# EAGLE board rescue_linea3cny (EAGLE 9.1.3)
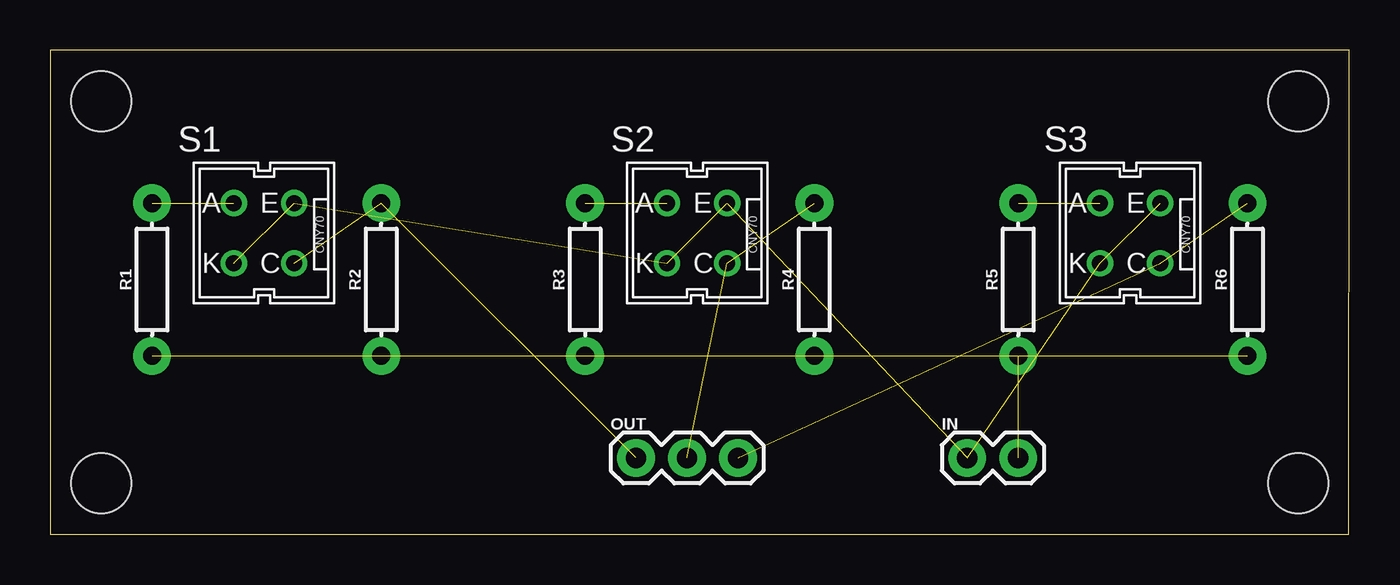
[diagram p0: board, top side]
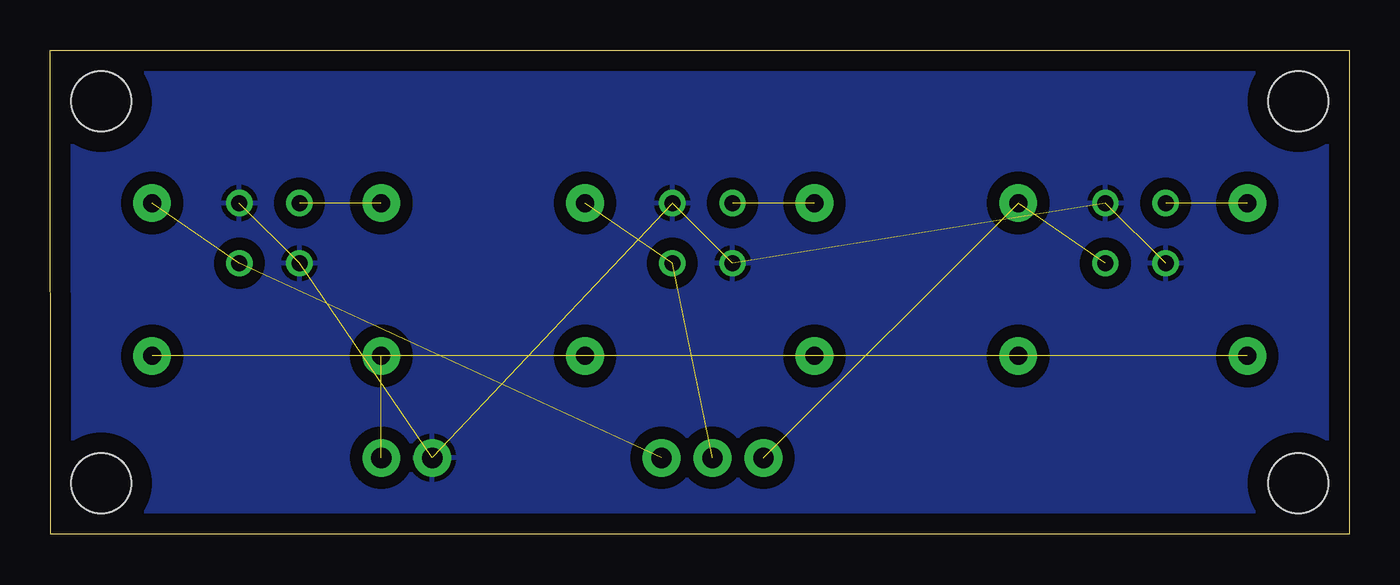
[diagram p1: board, bottom side, seen from below]

Size 64.77 x 24.13 mm. Coordinates in mm from the lower left corner, seen from the top.
Outline: 0,0 64.75,0 64.77,24.13 0,24.13 0,0
Copper layers (1*16): Top 0.035mm / dielectric 1.5mm / Bottom 0.035mm
Design rules "default": minimum track width 6mil, minimum drill 0.35mm, track to track 6mil, track to pad 6mil, pad to pad 6mil, via to via 6mil, smd to smd 6mil, copper to edge 40mil, drill to drill 6mil, minimum pad ring 10mil, minimum via ring 8mil, stop-mask expansion 4mil, vias tented up to drill 0mil, thermal gap 10mil
Holes 3 mm at 2.54,21.59 2.54,2.54 62.23,2.54 62.23,21.59

## Footprints (pad centres in the part's own frame; a part is rotated, then mirrored left to right if it is on the bottom)
1X02 = drill 1.016 pad 1.88: 1 0,0; 2 2.54,0
1X03 = drill 1.016 pad 1.88: 1 0,0; 2 2.54,0; 3 5.08,0
AXIAL-0.3 = drill 0.9 pad 1.88: P$1 -3.81,0; P$2 3.81,0
CNY70 = drill 0.8: A -1,0; C 2,-3; E 2,0; K -1,-3

## Placement (x,y rotation side)
IN  [1X02]  45.72,3.81 0 top
OUT  455-1750-1-ND  [1X03]  29.21,3.81 0 top
R1  220  [AXIAL-0.3]  5.08,12.7 90 top
R2  10k  [AXIAL-0.3]  16.51,12.7 90 top
R3  220  [AXIAL-0.3]  26.67,12.7 90 top
R4  10k  [AXIAL-0.3]  38.1,12.7 90 top
R5  220  [AXIAL-0.3]  48.26,12.7 90 top
R6  10k  [AXIAL-0.3]  59.69,12.7 90 top
S1  CNY70  [CNY70]  10.16,16.51 0 top
S2  CNY70  [CNY70]  31.75,16.51 0 top
S3  CNY70  [CNY70]  53.34,16.51 0 top

## Library data of the parts
IN = SparkFun-Connectors
OUT = SparkFun-Connectors; PROD_ID: XXX-00000
R1-R6 = SparkFun-Resistors
S1-S3 = CNY70; CNY70: CNY70

## Nets
GND: IN.1 S1.E S1.K S2.E S2.K S3.E S3.K
N$1: R3.P$2 S2.A
N$2: R1.P$2 S1.A
N$3: R5.P$2 S3.A
OUT1: OUT.1 R2.P$2 S1.C
OUT2: OUT.2 R4.P$2 S2.C
OUT3: OUT.3 R6.P$2 S3.C
VCC: IN.2 R1.P$1 R2.P$1 R3.P$1 R4.P$1 R5.P$1 R6.P$1

## Tracks (layer width: path | path; a pad name or v marks a point on that pad's centre or on a via)
GND  (6 unrouted)
  pour Bottom (isolate 0.61): -1.27,25.4 66.04,25.4 66.04,-1.27 -1.27,-1.27
N$1  (1 unrouted)
N$2  (1 unrouted)
N$3  (1 unrouted)
OUT1  (2 unrouted)
OUT2  (2 unrouted)
OUT3  (2 unrouted)
VCC  (6 unrouted)